# Altium PCB LightLink.PcbDoc
Units mil, origin at the board's own origin, x right, y up, seen from the top; angles counter-clockwise.
Board outline 6000 x 4000 mil, 2 copper layers (Top Layer, Bottom Layer); 28 components, 41 nets, 109 pads, 0 vias.
Unrouted connection lines stored in the file: 53.
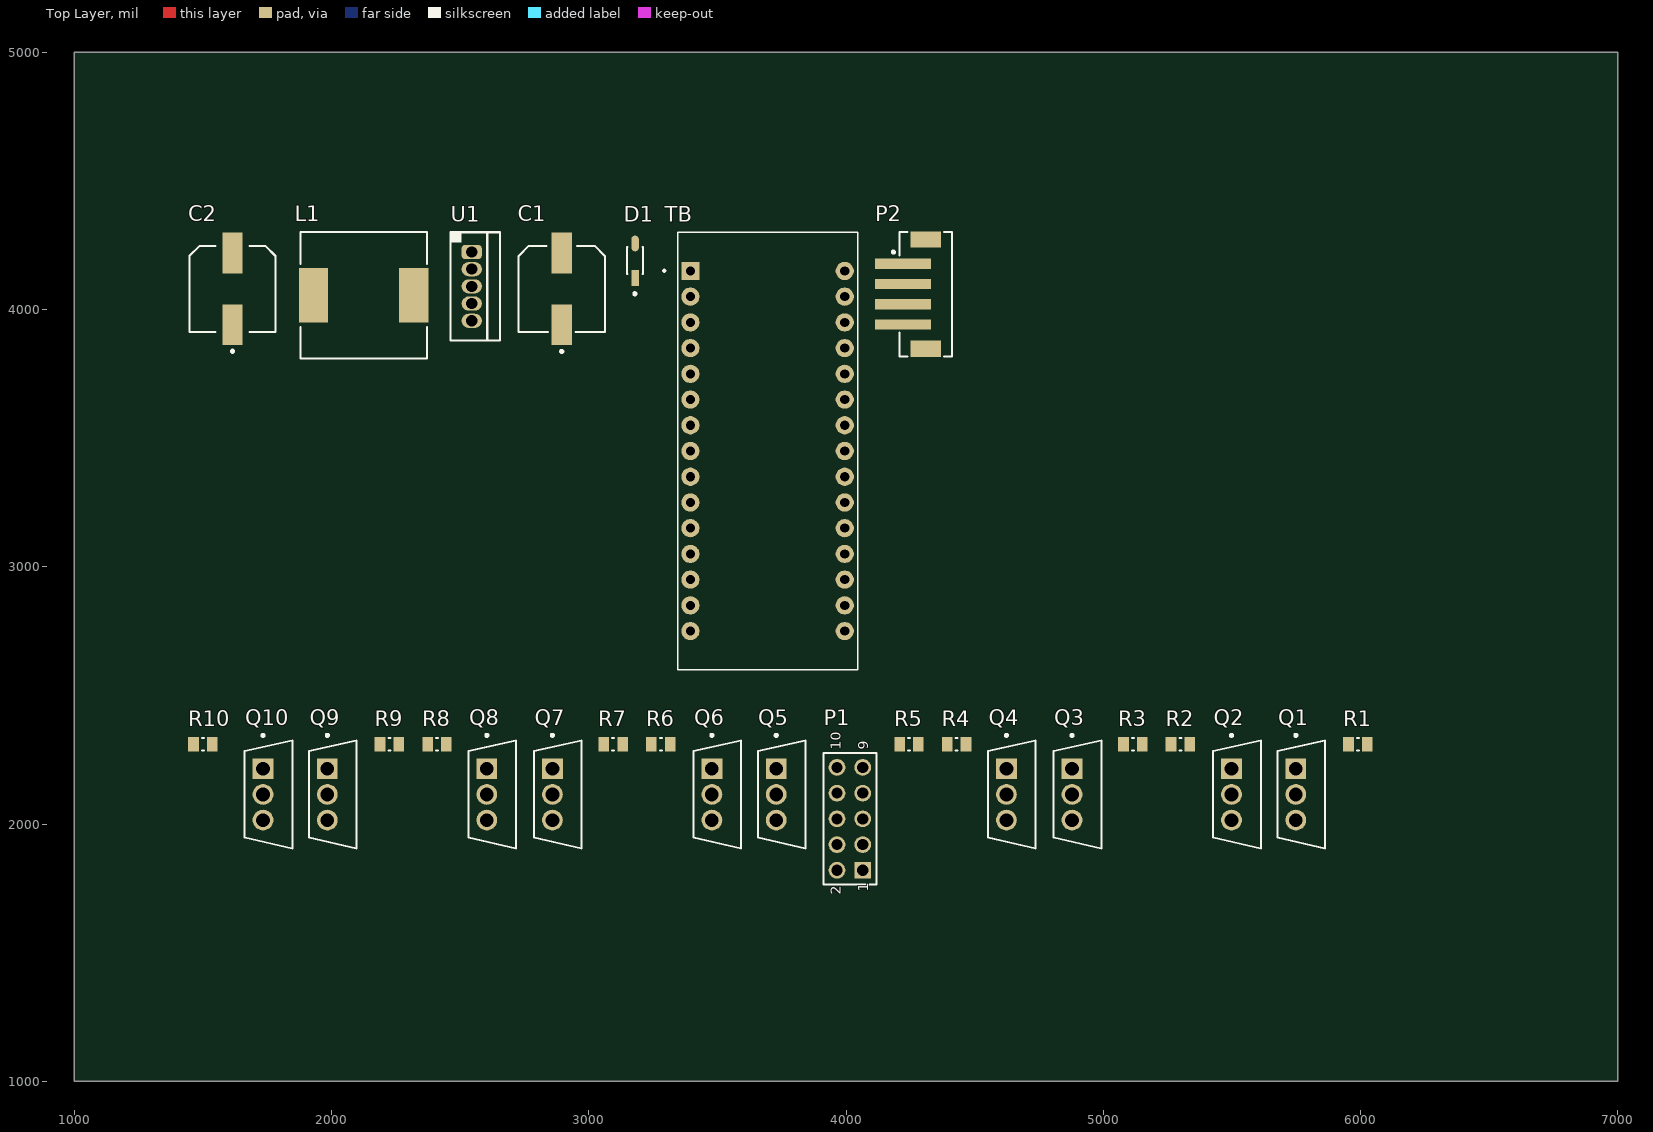
[diagram p0: Top Layer view]
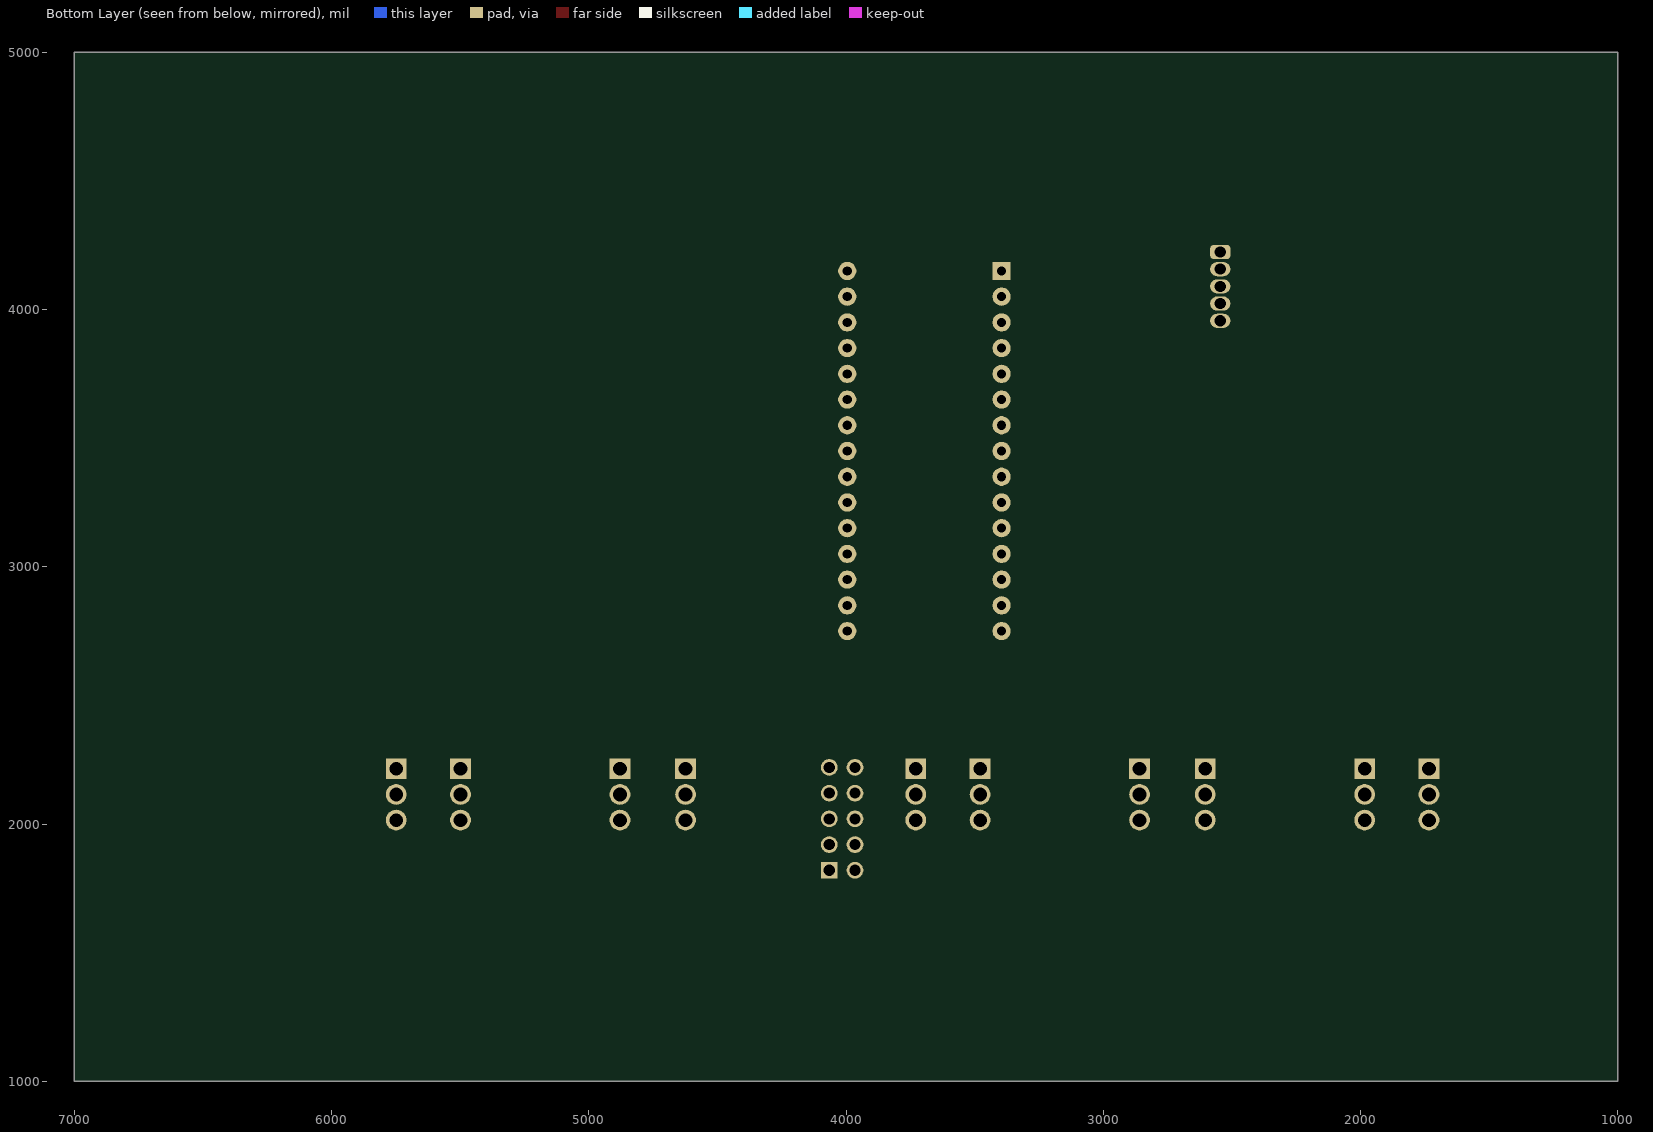
[diagram p1: Bottom Layer view, seen from below]

## Layer stack, top to bottom
Top Solder: solder mask 0.4, Solder Resist, Dk 3.5
Top Layer: signal copper 1.4
Dielectric 1: dielectric 12.6, FR-4, Dk 4.8
Bottom Layer: signal copper 1.4
Bottom Solder: solder mask 0.4, Solder Resist, Dk 3.5

## Board outline
1000,1000 7000,1000 7000,5000 1000,5000

## Design rules (kind name [scope] priority, off if disabled: settings)
Clearance [All] p1: gap=10 ignorepadtopadclearanceinfootprint=FALSE except(0: Arc-Hole Track-Hole SMDPad-Hole THPad-Hole Via-Hole Fill-Hole Poly-Hole Region-Hole Text-Hole)
PolygonConnect [All] p1: connectstyle=Relief reliefconductorwidth=10 reliefentries=4 polygonreliefangle="90 Angle" airgapwidth=10
RoomDefinition LightLink [InComponentClass('LightLink')] p1: confinementstyle=ConfineIn formatcopy=TRUE lockcomponents=FALSE outline 1425,2505 4430,2505 4430,4420 1425,4420
RoomDefinition Designator [InComponentClass('Designator')] p2: confinementstyle=ConfineIn formatcopy=TRUE lockcomponents=FALSE outline 1425,1710 6065,1710 6065,2460 1425,2460
RoutingVias [All] p1: holewidth=28 width=50 viastyle="Through Hole" minholewidth=28 minwidth=50 maxholewidth=28 maxwidth=50
SolderMaskExpansion [All] p1: expansion=4 istentingtop=FALSE
Width [All] p1: maxlimit=10 minlimit=10 preferedwidth=10
30 further rules are at their usual default settings.

## Classes and differential pairs
component class LightLink: C1 C2 D1 L1 P2 TB U1 U2
component class Designator: P1 Q1 Q2 Q3 Q4 Q5 Q6 Q7 Q8 Q9 Q10 R1 R2 R3 R4 R5 R6 R7 R8 R9 R10

## Components (designator, comment, footprint, x,y, rotation, side; value= is the part's Value field where it differs from the comment)
C1 "EEE-FP1E331AP" FP-FPF-MFG 2895,4080 r90 top
C2 "EEEFK1H101P" FP-FKF-MFG 1615,4080 r90 top
D1 "1N5819HW-7-F" FP-SOD123-IPC_A 3180,4190 r90 top
L1 "7447709331" WE-PD-XXL 2125,4055 r0 top
P1 "61301021121" 61301021121 4015,2020 r90 top
P2 "620304124022" 620304124022 4310,4060 r90 top
Q1 "FQP30N06" FP-340AT-MFG 5770,2115 r0 top
Q2 "FQP30N06" FP-340AT-MFG 5520,2115 r0 top
Q3 "FQP30N06" FP-340AT-MFG 4900,2115 r0 top
Q4 "FQP30N06" FP-340AT-MFG 4645,2115 r0 top
Q5 "FQP30N06" FP-340AT-MFG 3750,2115 r0 top
Q6 "FQP30N06" FP-340AT-MFG 3500,2115 r0 top
Q7 "FQP30N06" FP-340AT-MFG 2880,2115 r0 top
Q8 "FQP30N06" FP-340AT-MFG 2625,2115 r0 top
Q9 "FQP30N06" FP-340AT-MFG 2005,2115 r0 top
Q10 "FQP30N06" FP-340AT-MFG 1755,2115 r0 top
R1 "CRCW08051K00FKEA" RESC2013X50X30NL20T20 5990,2310 r0 top
R2 "CRCW08051K00FKEA" RESC2013X50X30NL20T20 5300,2310 r0 top
R3 "CRCW08051K00FKEA" RESC2013X50X30NL20T20 5115,2310 r0 top
R4 "CRCW08051K00FKEA" RESC2013X50X30NL20T20 4430,2310 r0 top
R5 "CRCW08051K00FKEA" RESC2013X50X30NL20T20 4245,2310 r0 top
R6 "CRCW08051K00FKEA" RESC2013X50X30NL20T20 3280,2310 r0 top
R7 "CRCW08051K00FKEA" RESC2013X50X30NL20T20 3095,2310 r0 top
R8 "CRCW08051K00FKEA" RESC2013X50X30NL20T20 2410,2310 r0 top
R9 "CRCW08051K00FKEA" RESC2013X50X30NL20T20 2225,2310 r0 top
R10 "CRCW08051K00FKEA" RESC2013X50X30NL20T20 1500,2310 r0 top
TB "ARDUINO_NANO" SHIELD_ARDUINO_NANO 3695,3450 r0 top
U1 "LM2575T-5.0" KC0005A 2545,4090 r0 top

## Footprints (in the part's own frame and the unit in brackets; to place one, negate y for a bottom-side part, rotate by r counter-clockwise, add the part's x,y. Pads: shape width x height; smd on the part's side, far side on the other; paste and mask are expansions set on the pad)
61301021121 [mm] "Pin Header, pitch 2.54 mm, THT, Vertical, dual row, 10p"
  rect 1.65x1.65 hole 1.1: 1(-5.08,-1.27)
  round 1.65 hole 1.1: 2(-5.08,1.27) 3(-2.54,-1.27) 4(-2.54,1.27) 5(0,-1.27) 6(0,1.27) 7(2.54,-1.27) 8(2.54,1.27) 9(5.08,-1.27) 10(5.08,1.27)
  silkscreen extent -6.5,-2.62 6.5,2.62, body extent -6.35,-2.54 6.35,2.54, height 8.59
620304124022 [mm] "2.00mm SMT Male Vertical Shrouded Header, 4p"
  rect 1x5.5 smd: 1(3,2.25) 2(1,2.25) 3(-1,2.25) 4(-3,2.25)
  rect 1.6x3 smd: MP1(-5.4,0) MP2(5.4,0)
  silkscreen extent -6.15,-2.6 6.15,3.32, body extent -6,-2.5 6,4.51, height 6.77
FP-340AT-MFG [mm]
  rect 2.05x2.05 hole 1.35 paste-1000 mask+0: 1(-0.54,2.535)
  round 2.05 hole 1.35 paste-1000 mask+0: 2(-0.54,0) 3(-0.54,-2.535)
  silkscreen extent -2.35,-5.34 2.35,5.96, body extent -2.45,-5.44 2.45,5.44, height 0.25
FP-FKF-MFG [mm]
  rect 4x2 smd paste+0 mask+0: 1(-3.55,0) 2(3.55,0)
  silkscreen extent -6.27,-4.25 4.25,4.25, body extent -5.8,-4.5 5.8,4.5, height 0.25
FP-FPF-MFG [mm]
  rect 4x2 smd paste+0 mask+0: 1(-3.55,0) 2(3.55,0)
  silkscreen extent -6.3,-4.25 4.25,4.25, body extent -5.8,-4.5 5.8,4.5, height 0.25
FP-SOD123-IPC_A [mil]
  rect 61.32x29.23 smd paste+0 mask+0: 1(-66.94,0)
  rrect100% 61.32x29.23 smd paste+0 mask+0: 2(66.94,0)
  silkscreen extent -134,-31 52,31, body extent -117,-50 117,50, height 10
KC0005A [mm] "FM, 5-Leads, Body 10.16x8.46mm, Pitch 1.7mm"
  rrect50% 2x1.4 hole 1.1: 1(0,3.4)
  oval 2x1.4 hole 1.1: 2(0,1.7) 3(0,0) 4(0,-1.7) 5(0,-3.4)
  silkscreen extent -2.13,-5.35 2.8,5.35, body extent -2.08,-5.35 2.77,5.35, height 16.51
RESC2013X50X30NL20T20 [mm] "Chip Resistor, 2-Leads, Body 2.00x1.25mm, IPC Medium Density"
  rect 1.05x1.45 smd: 1(-0.925,0) 2(0.925,0)
  silkscreen extent -0.1,-0.63 0.1,0.63, body extent -1.1,-0.72 1.1,0.72, height 0.5
SHIELD_ARDUINO_NANO [mm]
  rect 1.8x1.8 hole 0.9: 1(-7.62,17.78)
  round 1.8 hole 0.9: 2(-7.62,15.24) 3(-7.62,12.7) 4(-7.62,10.16) 5(-7.62,7.62) 6(-7.62,5.08) 7(-7.62,2.54) 8(-7.62,0) 9(-7.62,-2.54) 10(-7.62,-5.08) 11(-7.62,-7.62) 12(-7.62,-10.16) 13(-7.62,-12.7) 14(-7.62,-15.24) 15(-7.62,-17.78) 16(7.62,-17.78) 17(7.62,-15.24) 18(7.62,-12.7) 19(7.62,-10.16) 20(7.62,-7.62) 21(7.62,-5.08) 22(7.62,-2.54) 23(7.62,0) 24(7.62,2.54) 25(7.62,5.08) 26(7.62,7.62) 27(7.62,10.16) 28(7.62,12.7) 29(7.62,15.24) 30(7.62,17.78)
  silkscreen extent -10.3,-21.59 8.89,21.59
WE-PD-XXL [mm] "SMD Inductor, 2-Leads, Body 12.0 x 12.0 mm"
  rect 2.9x5.4 smd: 1(-4.95,0) 2(4.95,0)
  silkscreen extent -6.25,-6.25 6.25,6.25, body extent -6,-6 6,6, height 10.36

## Part data
C1: library part CMP-05427-000082-1, "CAP ALUM 330UF 20% 25V SMD", Capacitance=330uF, Case/Package=Radial, Dielectric Material=Aluminium, ESR (Equivalent Series Resistance)=80mR, Leakage Current=82.5uA, Max Operating Temperature=105°C, Min Operating Temperature=-55°C, Package Quantity=500, Ripple Current=850mA, Tolerance=20%, Voltage=25V, Construction=Cylindrical, Contact Plating=Tin, Diameter=8mm, Height=10.2mm, Height - Seated (Max)=0.402inch, Lead Free="Lead Free", Lead Pitch=3.1mm, Length=10.5mm, Life (Hours)=2000Hour, Material=Aluminium, Mount="Surface Mount", Number of Pins=2, Packaging="Tape and Reel", Radiation Hardening=No, REACH SVHC="No SVHC", Ripple Current (AC)=850mA, RoHS Compliant=Yes, Series=FP, Termination=SMD/SMT, Voltage Rating=25V, Voltage Rating (DC)=25V, Width=8.3mm
C2: library part CMP-2000-06208-3, "CAP ALUM 100UF 20% 50V SMD", Capacitance=100uF, Case/Package=Radial, Dielectric Material=Aluminium, ESR (Equivalent Series Resistance)=340mR, Leakage Current=3uA, Max Operating Temperature=105°C, Min Operating Temperature=-55°C, Package Quantity=1, Ripple Current=350mA, Tolerance=20%, Voltage=50V, Construction=Cylindrical, Contact Plating=Tin, Diameter=8mm, Height=10.2mm, Height - Seated (Max)=0.402inch, Impedance=340mR, Lead Free="Lead Free", Length=10.2mm, Life (Hours)=2000Hour, Material=Aluminium, Mount="Surface Mount", Number of Pins=2, Packaging="Tape and Reel", Radiation Hardening=No, REACH SVHC="No SVHC", Ripple Current (AC)=350mA, RoHS Compliant=Yes, Series=FK, Termination=SMD/SMT, Voltage Rating=50V, Voltage Rating (DC)=50V, Width=10mm
D1: library part CMP-0303-00003-3, "DIODE SCHOTTKY 40V 1A SOD123", Average Rectified Current=1A, Capacitance=110pF, Case/Package=SOD-123-2, Forward Voltage=450mV, Max Forward Surge Current (Ifsm)=25A, Max Operating Temperature=125°C, Max Power Dissipation=450mW, Max Repetitive Reverse Voltage (Vrrm)=40V, Min Operating Temperature=-65°C, Package Quantity=3000, Peak Reverse Current=50uA, Contact Plating=Tin, Current Rating=1A, Element Configuration=Single, Forward Current=1A, Height=1.25mm, Lead Free="Lead Free", Length=2.85mm, Max Reverse Voltage (DC)=40V, Number of Pins=2, Output Current=1A, Packaging="Tape and Reel", Peak Non-Repetitive Surge Current=25A, Polarity=Standard, Radiation Hardening=No, REACH SVHC="No SVHC", Termination=SMD/SMT, Voltage Rating (DC)=40V, Weight=0.000353oz, Width=1.7mm
L1: library part CMP-0227-00183-1, "SMD-Shielded Power Inductor WE-PD, L = 330 µH", Inductance="330 ÂµH", ComponentLink1Description="Manufacturer Link", ComponentLink1URL=http://www.we-online.com, ComponentLink2Description=Datasheet, ComponentLink2URL=http://www.we-online.de/katalog/media/pdf/7447709331.pdf, DatasheetVersion="ver 1, Oct-2004", PackageDescription="SMD Inductor, 2-Leads, Body 12.0 x 12.0 mm", PackageReference=WE-PD-XXL, PackageVersion=2004
P1: library part CMP-1502-01084-1, "THT Vertical Pin Header WR-PHD, Pitch 2.54 mm, Dual Row, 10 pins", Contact Resistance=20mOhm, Manufacturer="Wurth Elektronik", Operating Temperature=-40to105degC, Rated Current=3A, Withstanding Voltage=500VAC, Working Voltage=250VAC, Datasheet URL=https://katalog.we-online.de/em/datasheet/6130xx21121.pdf, Gender=Male, Manufacturer URL=http://www.we-online.de, Mounting Technology=THT, Orientation=Vertical, Package Reference=61301021121, Packaging=Bag, Part Number=61301021121, Pin Number=10, Pitch=2.54mm, Publisher=WurthElektronik, Row Number=Dual
P2: library part CMP-1502-00662-1, "Male Shrouded Header WR-WTB, SMT, Vertical, pitch 2 mm, 1 x 4 position", Contact Resistance=20mOhm, Manufacturer="Wurth Elektronik", Operating Temperature=-25to85degC, Working Voltage=100VAC, Datasheet URL=https://katalog.we-online.de/em/datasheet/6203xx124022.pdf, Gender=Male, Manufacturer URL=http://www.we-online.de, Mounting Technology=SMT, Orientation=Vertical, Package Reference=620304124022, Packaging=TapeandReel, Part Number=620304124022, Pitch=2mm, Position=1x4, Publisher=WurthElektronik
Q1 Q2 Q3 Q4 Q5 Q6 Q7 Q8 Q9 Q10: library part CMP-07173-000001-1, "MOSFET N-CH 60V 30A TO-220", Continuous Drain Current=30A, Drain To Source Breakdown Voltage=60V, Drain To Source Resistance=0.031Ω, Gate To Source Voltage=25V, Input Capacitace At Vds="725pF @ 25V", Manufacturer="ON Semiconductor", Max Forward Diode Voltage=1.5V, Max Junction Temp=+175°C, Package=340AT, Power Dissipation=79W, Pulse Drain Current=120A, Temperature="-55°C to +175°C", Temperature Range Low=-55°C, Automotive=No, Category=Trans, ComponentLink2Description=Datasheet, ComponentLink2URL=https://www.onsemi.com/pub/Collateral/FQP30N06-D.pdf, Depletion Mode=False, Device Class L1="Discrete Semiconductors", Device Class L2=Transistors, Device Class L3=MOSFETs, Digikey Description="MOSFET N-CH 60V 30A TO-220", Drain To Source Voltage=60V, Footprint Url=https://www.onsemi.com/pub/Collateral/340AT.PDF, Gate Charge At Vgs="19nC @ 10V", Height=20.4mm, Ipc Land Pattern Name=TO-220, Lead Free=Yes, Manufacturer Part Number=FQP30N06, Mouser Description="MOSFET 60V N-Channel QFET", Number Of Channels=1, Number Of N Channels=1, Octopart=https://octopart.com/fqp30n06-on+semiconductor-84328004, Reverse Recovery Charge=65nC, Reverse Recovery Time=45ns, RoHS=TRUE, Rthja Max=62.5°C/W, Standoff Height=2.7mm, Temperature Range High=+175°C, Threshold Vgs Max=4V, Threshold Vgs Min=2V, Transconductance=16S, Turn Off Delay Time=35ns, Turn On Delay Time=10ns
R1 R2 R3 R4 R5 R6 R7 R8 R9 R10: library part CMP-1013-00510-2, Manufacturer="Vishay Dale", Part Number=CRCW08051K00FKEA
TB: library part CMP-002-000000-1, "ATSAMD21G18A Arduino Nano 33 IoT SAM D ARMÂ® CortexÂ®-M0+ MCU 32-Bit Embedded Evaluation Board", Package=None, Availability=Unavailable, Component Type=Standard, Design Item ID=ARDUINO_NANO, MF=Arduino, MP="ARDUINO NANO", Pin Count=30, Price=None, SnapEDA_Link=https://www.snapeda.com/parts/ARDUINO%20NANO/Arduino/view-part/1128261/?ref=snap, Source=SnapEDAsch.SchLib
U1: library part CMP-0069-02026-3, "SIMPLE SWITCHER® 1A Step-Down Voltage Regulator, 5-pin TO-220", Manufacturer="Texas Instruments", PackageTopMarking="NSUZXYTTE#*LM2575T*-5.0 P+", PowerWise=N, Code_JEDEC=TO-220-AB, ComponentLink1Description="Datasheet URL", ComponentLink1URL=http://www.ti.com/general/docs/lit/getliterature.tsp?genericPartNumber=LM2575-N&fileType=pdf, CompType=Switcher, PackageDescription="TO-220, Molded, 5 Lead, Straight", PackageReference=KC0005A, PinCount=5, RoHS=N

## Nets (pads, with @x,y where several pads share a name; then routed paths per layer and width w, separated by ;. In a path a pad name is that pad's centre, name@x,y a point inside that pad or via, vN(x,y) a via of type N, cw(c..) or ccw(c..) an arc to the next point about the centre after c; other vN are vias at no path point)
GND: C1.1 C2.1 D1.2 P2.1 TB.29 U1.3 U1.5
NetC1_2: C1.2 L1.2 TB.30 U1.4
NetC2_2: C2.2 P2.2 Q1.3 Q2.3 Q3.3 Q4.3 Q5.3 Q6.3 Q7.3 Q8.3 Q9.3 Q10.3 U1.1
NetD1_1: D1.1 L1.1 U1.2
NetP1_1: P1.1 Q2.2
NetP1_2: P1.2 Q1.2
NetP1_3: P1.3 Q4.2
NetP1_4: P1.4 Q3.2
NetP1_5: P1.5 Q6.2
NetP1_6: P1.6 Q5.2
NetP1_7: P1.7 Q8.2
NetP1_8: P1.8 Q7.2
NetP1_9: P1.9 Q10.2
NetP1_10: P1.10 Q9.2
NetP2_3: P2.3
NetP2_4: P2.4
NetQ1_1: Q1.1 R3.1
NetQ2_1: Q2.1 R1.2
NetQ3_1: Q3.1 R5.1
NetQ4_1: Q4.1 R2.2
NetQ5_1: Q5.1 R7.1
NetQ6_1: Q6.1 R4.2
NetQ7_1: Q7.1 R9.1
NetQ8_1: Q8.1 R6.2
NetQ9_1: Q9.1 R10.1
NetQ10_1: Q10.1 R8.2
NetR1_1: R1.1 TB.11
NetR2_1: R2.1 TB.12
NetR3_2: R3.2 TB.7
NetR4_1: R4.1 TB.13
NetR5_2: R5.2 TB.6
NetR6_1: R6.1 TB.9
NetR7_2: R7.2 TB.5
NetR8_1: R8.1 TB.8
NetR9_2: R9.2 TB.1
NetR10_2: R10.2 TB.2
NetTB_4: TB.4
NetTB_14: TB.14
NetTB_15: TB.15
NetTB_16: TB.16
NetTB_27: TB.27
pads on no net: P2.MP1 P2.MP2 TB.3 TB.10 TB.17 TB.18 TB.19 TB.20 TB.21 TB.22 TB.23 TB.24 TB.25 TB.26 TB.28

## Text inside footprints (layer, text, board x,y; h text height)
P1: Top Overlay "10" at 3979.57,2288.11 h40 r90; Top Overlay "9" at 4085.87,2288.11 h40 r90; Top Overlay "1" at 4085.87,1736.14 h40 r90; Top Overlay "2" at 3979.57,1724.33 h40 r90